# Altium PCB PCB_Main_Board.PcbDoc
Units mm, origin at the board's own origin, x right, y up, seen from the top; angles counter-clockwise.
Board outline 70.8 x 18.88 mm, 4 copper layers (Top Signal, GND, PWR, Bottom Signal), stack 1.075 mm thick; 57 components, 23 nets, 136 pads, 35 vias.
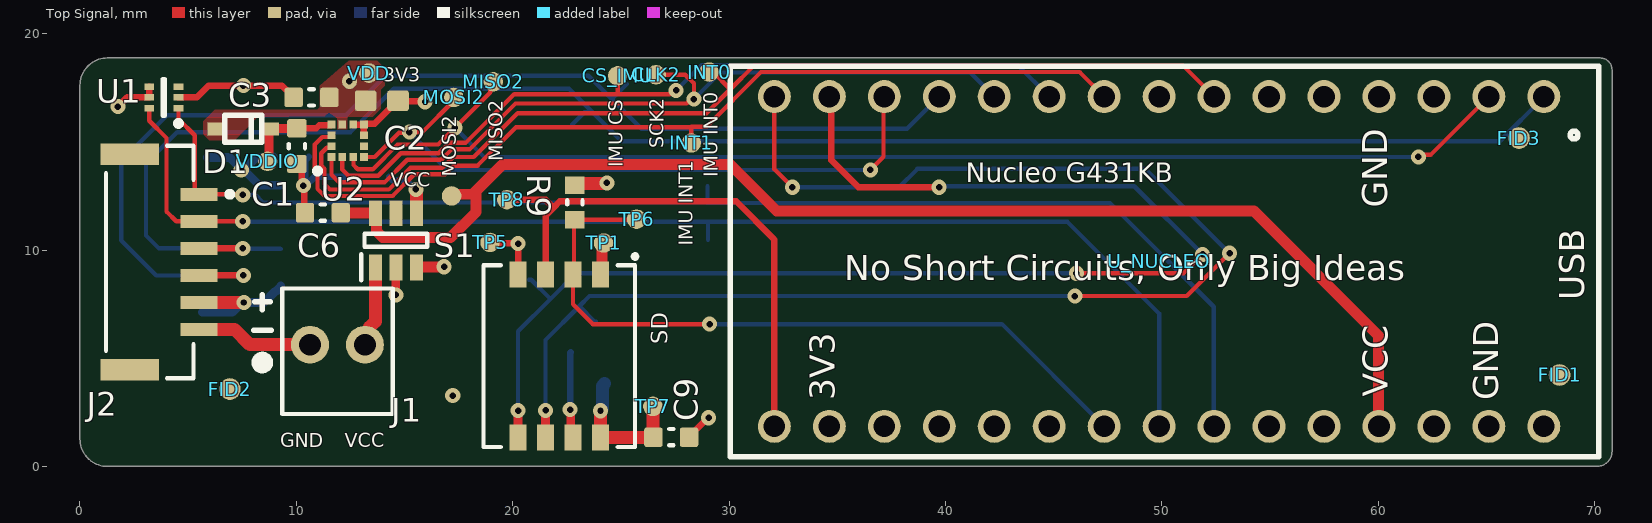
[diagram p0: Top Signal view]
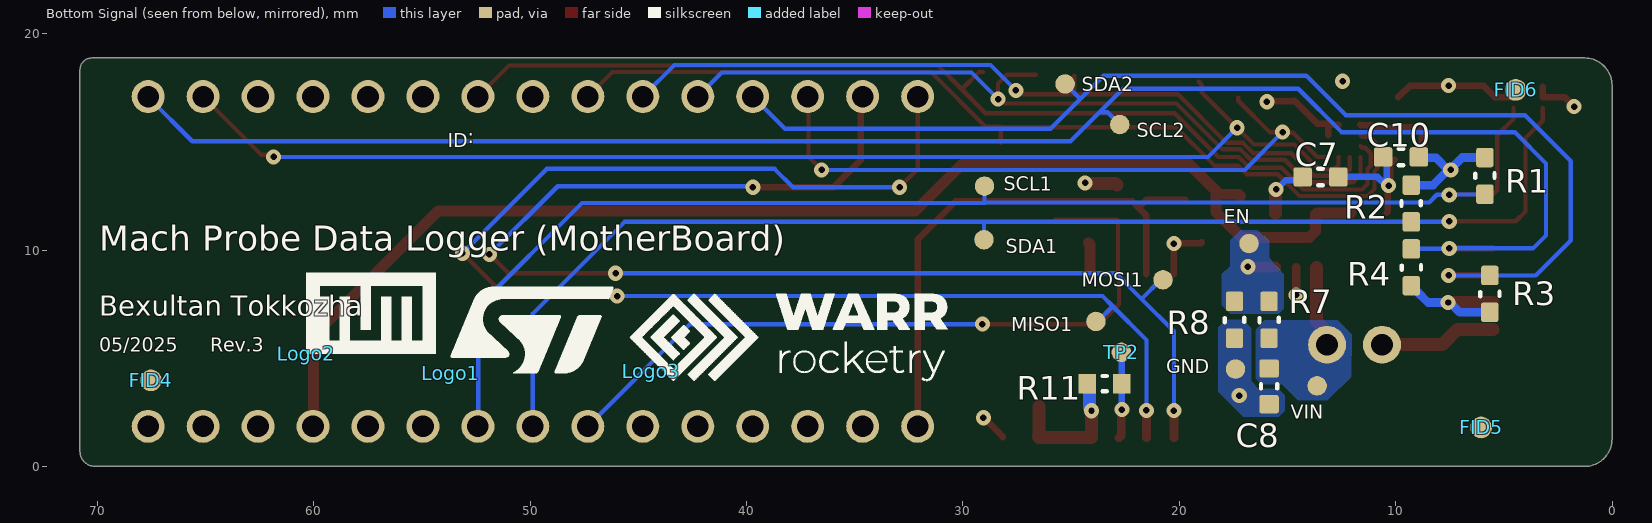
[diagram p1: Bottom Signal view, seen from below]
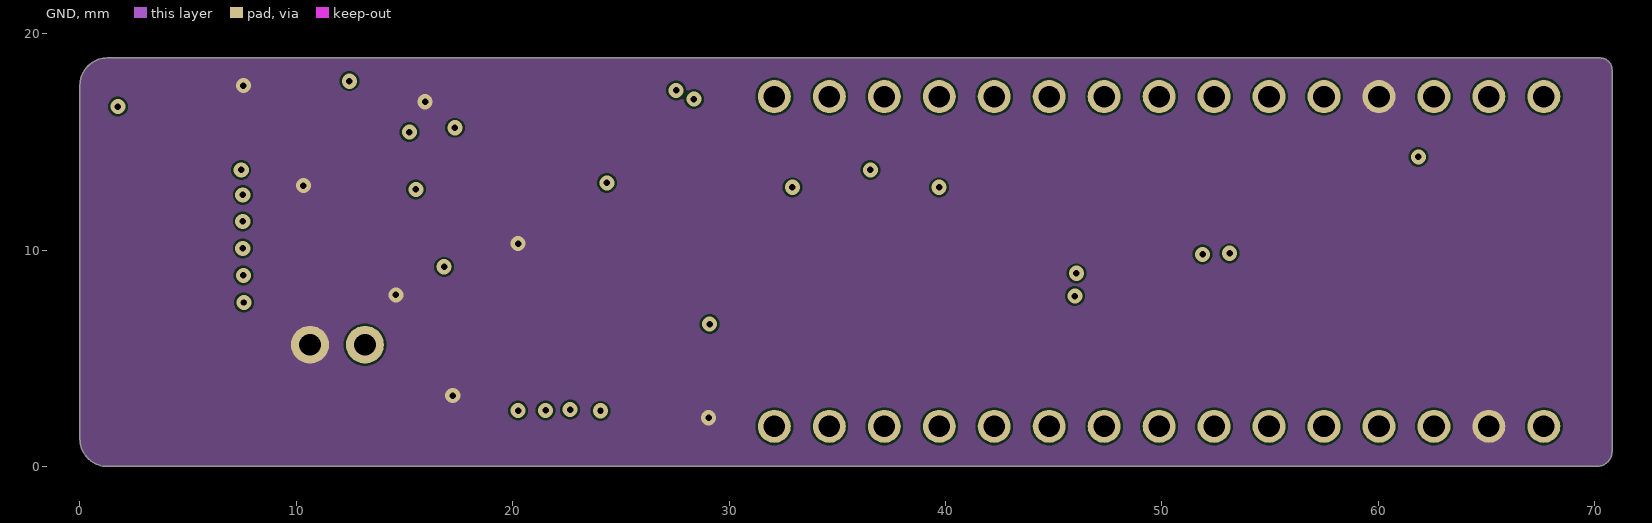
[diagram p2: GND]
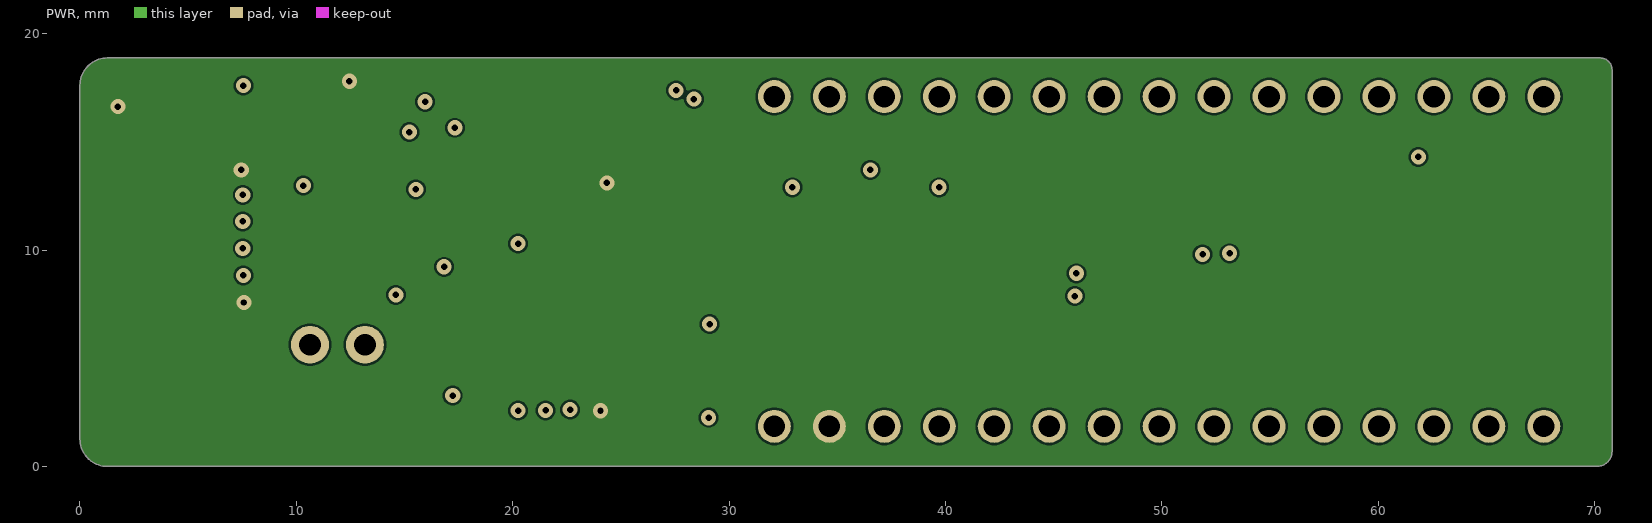
[diagram p3: PWR]
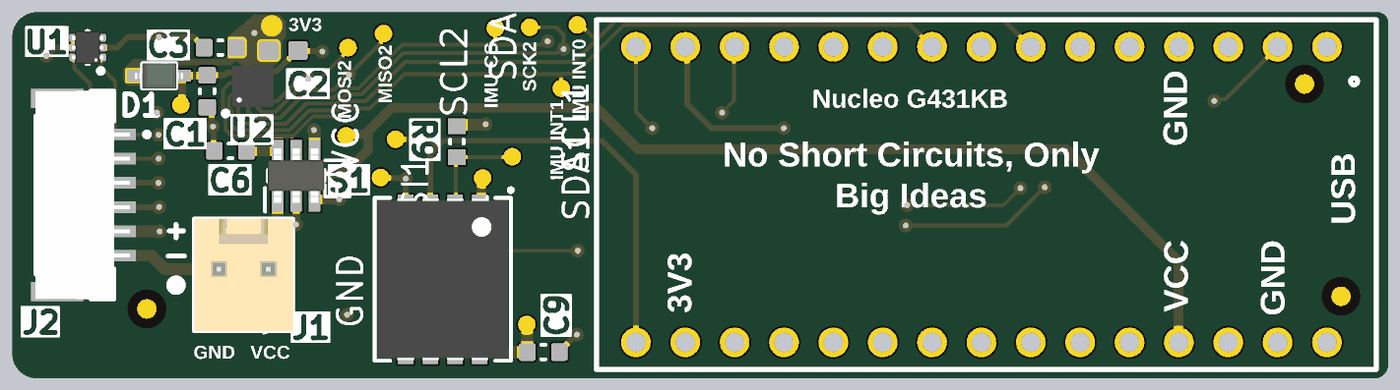
[diagram p4: 3D render of the assembled board from above, using the file's embedded part models]

## Layer stack, top to bottom
Top Solder: solder mask 0.0254, SM-001, Dk 4
Top Signal: signal copper 0.035
Dielectric 2: prepreg 0.1295, PP-017, Dk 4.3
GND: signal copper 0.0175
Dielectric 3: core 0.7112, Core-039, Dk 4.8
PWR: signal copper 0.0175
Dielectric 4: prepreg 0.1295, PP-017, Dk 4.3
Bottom Signal: signal copper 0.035
Bottom Solder: solder mask 0.0254, SM-001, Dk 4

## Board outline
0,1.27 0,17.605 cw(c1.27,17.605) 1.27,18.875 70.25,18.875 cw(c70.25,18.325) 70.8,18.325 70.8,0.7 cw(c70.1,0.7) 70.1,0 1.27,0 cw(c1.27,1.27)

## Design rules (kind name [scope] priority, off if disabled: settings)
Clearance [All] p1: gap=0.1 ignorepadtopadclearanceinfootprint=FALSE
ComponentClearance ComponentClearance_fiducial [HasFootprint('Fiducial_1mm')] p1: gap=0.254 collisioncheckmode=3 verticalgap=0.254 showdistances=FALSE donotcheckwithout3dbody=TRUE
ComponentClearance [All] p2: gap=0.254 collisioncheckmode=3 verticalgap=0.254 showdistances=FALSE
HoleToHoleClearance [All] p1: gap=0.1 allowstackedmicrovias=TRUE
MinimumSolderMaskSliver [All] p1: minsoldermaskwidth=0.1
PolygonConnect [All] p1: connectstyle=Direct reliefconductorwidth=0.254 reliefentries=4 polygonreliefangle="90 Angle" airgapwidth=0.254
RoutingVias [All] p1: holewidth=0.711 width=1.27 viastyle="Through Hole" minholewidth=0.15 minwidth=0.25 maxholewidth=0.711 maxwidth=1.27
SilkToSilkClearance [All] p1: silktosilkclearance=0.1
SilkToSolderMaskClearance [IsPad] p1: minsilkscreentomaskgap=0.1 clearancetoexposedcopper=TRUE
SolderMaskExpansion [All] p1: expansion=0.102 istentingtop=FALSE
SupplyNets "Schematic Supply Nets_3" [InNet('+3V3')] p1: voltage=0.000
SupplyNets "Schematic Supply Nets_2" [InNet('GND')] p2: voltage=0.000
SupplyNets "Schematic Supply Nets_1" [InNet('VCC')] p3: voltage=0.000
SupplyNets "Schematic Supply Nets" [InNet('VCC_Battery')] p4: voltage=0.000
UnRoutedNet [All] p1: checkbadconnections=TRUE
Width [All] p1: maxlimit=1 minlimit=0.1 preferedwidth=0.3
24 further rules are at their usual default settings.

## Classes and differential pairs
component class TEMP_IMU_NAND: 1 C1 C2 C3 C9 C10 CLK2 CS_IMU D1 FID1 FID2 FID3 FID4 FID5 FID6 INT0 INT1 Logo1 Logo2 Logo3 MISO1 MISO2 MOSI1 MOSI2 R9 R11 SD TP1 TP2 TP5 TP6 TP7 TP8 U1 U2 VDD VDDIO

## Components (designator, comment, footprint, x,y, rotation, side; value= is the part's Value field where it differs from the comment)
C1 "C_0603_100n_5%_50V" CAP_0603 10.025,14.8 r90 top value=100nF
C2 "C_0603_10uF" GCM188R71E224KA55J 13.95,16.9 r0 top value=10µF
C3 "C_0603_100n_5%_50V" CAP_0603 10.7,17.05 r180 top value=100nF
C6 "C_0603_100n_5%_50V" CAP_0603 11.225,11.725 r180 top value=100nF
C7 "C_0603_10n_5%_50V" CAP_0603 13.475,13.375 r180 bottom value=10nF
C8 "C_0603_1u_10%_50V" CAP_0603 15.85,3.7 r90 bottom value=1µF
C9 "C_0603_1u_10%_50V" CAP_0603 27.325,1.35 r0 top value=1µF
C10 "C_0603_10n_5%_50V" CAP_0603 9.75,14.3 r0 bottom value=10nF
CLK2 "Testpoint" Testpoint-Footprint-1 26.625,18.1 r270 top
CS_IMU "Testpoint" Testpoint-Footprint-1 24.85,18.05 r270 top
D1 "BAT60A" BAT60A 7.55,15.6 r0 top
EN "Testpoint" Testpoint-Footprint-1 16.775,10.3 r270 bottom
FID1 "Fiducial" Fiducial_1mm 68.375,4.225 r270 top
FID2 "Fiducial" Fiducial_1mm 6.925,3.575 r270 top
FID3 "Fiducial" Fiducial_1mm 66.5,15.175 r270 top
FID4 "Fiducial" Fiducial_1mm 67.525,3.975 r90 bottom
FID5 "Fiducial" Fiducial_1mm 6.05,1.8 r90 bottom
FID6 "Fiducial" Fiducial_1mm 4.45,17.4 r90 bottom
GND "Testpoint" Testpoint-Footprint-1 17.4,4.5 r270 bottom
INT0 "Testpoint" Testpoint-Footprint-1 29.075,18.225 r270 top
INT1 "Testpoint" Testpoint-Footprint-1 28.25,14.95 r270 top
J1 "61900211121" 61900211121 11.9,5.625 r0 top
J2 "SM06B-GHS-TB(LF)(SN)" FP-SM06B-GHS-TB_LF_SN-MFG 3.225,9.45 r270 top locked
Logo1 "ST Microelectronics Logo" "New footprint 1"#1 53.675,4.3 r180 bottom
Logo2 "TUM Logo" "New footprint 1"#1 60.35,5.2 r180 bottom
Logo3 "WARR Rocketry Logo" "WARR Rocketry Logo-Footprint-1" 44.4,4.4 r180 bottom
MISO1 "Testpoint" Testpoint-Footprint-1 23.85,6.7 r270 bottom
MISO2 "Testpoint" Testpoint-Footprint-1 19.1,17.775 r270 top
MOSI1 "Testpoint" Testpoint-Footprint-1 20.75,8.625 r270 bottom
MOSI2 "Testpoint" Testpoint-Footprint-1 17.275,17.05 r270 top
R1 "RES_0603_4k7_1%_0.1W" RES_0603_YAGEO 5.875,13.425 r90 bottom value=4.7k
R2 "RES_0603_4k7_1%_0.1W" RES_0603_YAGEO 9.275,12.15 r90 bottom value=4.7k
R3 "RES_0603_4k7_1%_0.1W" RES_0603_YAGEO 5.65,7.975 r270 bottom value=4.7k
R4 "RES_0603_4k7_1%_0.1W" RES_0603_YAGEO 9.275,9.2 r270 bottom value=4.7k
R7 "RES_0603_182k_1%_0.1W" RES_0603_YAGEO 15.85,6.775 r270 bottom value=182k
R8 "RES_0603_100k_1%_0.1W" RES_0603_YAGEO 17.45,6.775 r270 bottom value=100k
R9 "RES_0603_15k" R_0603_Yageo 22.875,12.2 r90 top value=15k
R11 "RES_0603_15k" R_0603_Yageo 23.45,3.825 r0 bottom value=15k
S1 "TPS22810DBVR" SOT95P280X145-6N 14.6,10.45 r90 top
SCL1 "Testpoint" Testpoint-Footprint-1 29,12.95 r270 bottom
SCL2 "Testpoint" Testpoint-Footprint-1 22.75,15.8 r270 bottom
SD "MKDV08GCL-STP" "New footprint 1"#2 22.15,5.1 r270 top
SDA1 "Testpoint" Testpoint-Footprint-1 29.025,10.475 r270 bottom
SDA2 "Testpoint" Testpoint-Footprint-1 25.275,17.675 r270 bottom
TP1 "Testpoint" Testpoint-Footprint-1 24.2,10.325 r270 top
TP2 "Testpoint" Testpoint-Footprint-1 22.675,5.275 r270 bottom
TP5 "Testpoint" Testpoint-Footprint-1 18.95,10.35 r270 top
TP6 "Testpoint" Testpoint-Footprint-1 25.725,11.425 r270 top
TP7 "Testpoint" Testpoint-Footprint-1 26.475,2.775 r270 top
TP8 "Testpoint" Testpoint-Footprint-1 19.725,12.325 r270 top
U1 "TMP102AIDRLR" SOTFL127P600-8N 3.875,17.05 r180 top
U2 "2533020201601" QFN50P200X200X70-12N 12.375,15.05 r90 top
U_NUCLEO "NUCLEO-G431KB" NUCLEO-G431KB-Footprint-1 67.65,17.09 r180 top locked
VCC "Testpoint" Testpoint-Footprint-1 17.175,12.5 r270 top
VDD "Testpoint" Testpoint-Footprint-1 13.35,18.175 r270 top
VDDIO "Testpoint" Testpoint-Footprint-1 8.675,14.1 r270 top
VIN "Testpoint" Testpoint-Footprint-1 13.625,3.725 r270 bottom

## Footprints (in the part's own frame and the unit in brackets; to place one, negate y for a bottom-side part, rotate by r counter-clockwise, add the part's x,y. Pads: shape width x height; smd on the part's side, far side on the other; paste and mask are expansions set on the pad)
61900211121 [mm]
  round 1.75 hole 1: 1(-1.27,0) 2(1.27,0)
  silkscreen extent -3.72,-3.2 2.55,2.6, body extent -2.54,-3.2 2.54,2.6, height 11.5
BAT60A [mm]
  rect 0.8x0.6 smd: 1(-1.25,0) 2(1.25,0)
  silkscreen extent -0.85,-0.63 0.85,0.63, body extent -1.25,-0.65 1.25,0.65, height 1.1
CAP_0603 [mm] "Chip Capacitor, 2-Leads, Body 1,60x0,80mm, IPC Medium Density"
  rrect25% 0.85x0.9 smd: 1(-0.825,0) 2(0.825,0)
  silkscreen extent -0.1,-0.38 0.1,0.38, body extent -0.85,-0.45 0.85,0.45, height 0.55
Fiducial_1mm [mm] "1mm fiducial"
  round 1 smd paste-0.5 mask+0.5: 1(0,0)
  body extent -0.5,-0.5 0.5,0.5
FP-SM06B-GHS-TB_LF_SN-MFG [mm]
  rect 0.6x1.7 smd paste+0 mask+0: 1(-3.125,2.275) 2(-1.875,2.275) 3(-0.625,2.275) 4(0.625,2.275) 5(1.875,2.275) 6(3.125,2.275)
  rect 1x2.7 smd paste+0 mask+0: 7(-4.975,-0.925) 8(4.975,-0.925)
  silkscreen extent -5.38,-2.02 5.38,3.83, body extent -5.58,-2.37 5.58,3.22, height 0.25
GCM188R71E224KA55J [mm] "0603 Murata Electronics Capacitors"
  rrect25% 1x0.95 smd: 1(-0.75,0) 2(0.75,0)
  body extent -0.85,-0.45 0.85,0.45, height 0.9
"New footprint 1"#1 [mm]
  silkscreen extent 0,0 7.52,4
"New footprint 1"#2 [mm]
  rect 1.2x0.8 smd: 1(-3.77,1.905) 2(-3.77,0.635) 3(-3.77,-0.635) 4(-3.77,-1.905) 5(3.77,-1.905) 6(3.77,-0.635) 7(3.77,0.635) 8(3.77,1.905)
  silkscreen extent -4.7,-3.5 4.2,3.6, body extent -4.15,-3.35 4.15,3.35, height 0.95
NUCLEO-G431KB-Footprint-1 [mil]
  round 60 hole 39.37: 1(0,0) 2(100,0) 3(200,0) 4(300,0) 5(400,0) 6(500,0) 7(600,0) 8(700,0) 9(800,0) 10(900,0) 11(1000,0) 12(1100,0) 13(1200,0) 14(1300,0) 15(1400,0) 16(1400,600) 17(1300,600) 18(1200,600) 19(1100,600) 20(1000,600) 21(900,600) 22(800,600) 23(700,600) 24(600,600) 25(500,600) 26(400,600) 27(300,600) 28(200,600) 29(100,600) 30(0,600)
  silkscreen extent -100,-55 1480,655
QFN50P200X200X70-12N [mm] "QFN, 12-Leads, Body 2,00x2,00mm, Pitch 0,50mm, IPC Medium Density"
  rect 0.375x0.35 smd: 1(-0.75,0.75) 2(-0.75,0.25) 3(-0.75,-0.25) 4(-0.75,-0.75) 7(0.75,-0.75) 8(0.75,-0.25) 9(0.75,0.25) 10(0.75,0.75)
  rect 0.35x0.375 smd: 5(-0.25,-0.75) 6(0.25,-0.75) 11(0.25,0.75) 12(-0.25,0.75)
  silkscreen extent -1.52,1.27 -1.27,1.52, body extent -1.05,-1.05 1.05,1.05, height 0.7
R_0603_Yageo [mm] "Chip Resistor, 2-Leads, Body 1,65x0,85mm, IPC Medium Density"
  rect 0.8x0.9 smd: 1(-0.8,0) 2(0.8,0)
  silkscreen extent -0.1,-0.35 0.1,0.35, body extent -0.85,-0.45 0.85,0.45, height 0.55
RES_0603_YAGEO [mm] "Chip Resistor, 2-Leads, Body 1,60x0,80mm, IPC Medium Density"
  rrect25% 0.9x0.8 smd: 1(-0.85,0) 2(0.85,0)
  silkscreen extent -0.1,-0.44 0.12,0.45, body extent -0.85,-0.45 0.85,0.45, height 0.55
SOT95P280X145-6N [mm]
  rect 1.2x0.6 smd: 1(-1.25,0.95) 2(-1.25,0) 3(-1.25,-0.95) 4(1.25,-0.95) 5(1.25,0) 6(1.25,0.95)
  silkscreen extent -1.85,-1.45 0.3,1.6, body extent -1.4,-1.45 1.4,1.45, height 1.2
SOTFL127P600-8N [mm]
  rect 0.45x0.3 smd paste+0.05: 1(-0.675,0.5) 2(-0.675,0) 3(-0.675,-0.5) 4(0.675,-0.5) 5(0.675,0) 6(0.675,0.5)
  silkscreen extent -0.8,-0.85 0.05,1.32, body extent -0.8,-0.85 0.8,0.85, height 0.6
Testpoint-Footprint-1 [mm]
  round 0.9 smd paste-0.45 mask+0.1: 1(0,0)
"WARR Rocketry Logo-Footprint-1" [mm]
  silkscreen extent -0.98,-0.46 13.7,3.58

## Part data
C1 C3 C6: library part CMP-001-00115-4, "Ceramic Capacitor, Multilayer, Ceramic, 50V, 5% +Tol, 5% -Tol, X7R, 15% TC, 0.1uF, Surface Mount, 0603", Capacitor Type=Ceramic, Case/Package=0603, Max Operating Temperature=125°C, Min Operating Temperature=-55°C, Voltage Rating=50V, Mounting Technology="Surface Mount", Pins=2, RoHS Compliant=Yes
C2: library part CMP-001-00105-2, "Ceramic Capacitor, Multilayer, Ceramic, 16V, 20% +Tol, 20% -Tol, X6S, 22% TC, 10uF, Surface Mount, 0603", Capacitor Type=Ceramic, Case/Package=0603, Max Operating Temperature=105°C, Min Operating Temperature=-55°C, Package Shape=Rectangular, Package Style=SMTMeter, Rated DC Voltage (URdc)=16V, Temperature Characteristics Code=X6S, Tolerance  (fill in as +-)=20%, Dielectric Material=Ceramic, Height=0.8mm, JESD-609 Code=e3, Length=1.6mm, Mounting Technology="Surface Mount", Multilayer=Yes, Packaging="Tape and Reel", Pins=2, Reach SVHC Compliant=Yes, RoHS Compliant=Yes, Terminal Finish=Nickel, Termination=Wraparound, Tolerance (fill in as +-)=20%, Width=0.8mm
C7 C10: library part CMP-001-00107-9, "Ceramic Capacitor, Multilayer, Ceramic, 50V, 5% +Tol, 5% -Tol, X7R, 15% TC, 0.01uF, Surface Mount, 0603", Capacitor Type=Ceramic, Case/Package=0603, Max Operating Temperature=125°C, Min Operating Temperature=-55°C, Tolerance=5%, Voltage Rating=50V, Mounting Technology="Surface Mount", Pins=2, RoHS Compliant=Yes
C8 C9: library part CMP-001-00112-5, "Ceramic Capacitor, Multilayer, Ceramic, 50V, 10% +Tol, 10% -Tol, 1uF, Surface Mount, 0603", Capacitor Type=Ceramic, Case/Package=0603, Max Operating Temperature=85°C, Min Operating Temperature=-55°C, Voltage Rating=50V, Mounting Technology="Surface Mount", Pins=2, RoHS Compliant=Yes
CLK2 CS_IMU EN GND INT0 INT1 MISO1 MISO2 MOSI1 MOSI2 SCL1 SCL2 SDA1 SDA2 TP1 TP2 TP5 TP6 TP7 TP8 VCC VDD VDDIO VIN: library part CMP-00030-00002-7, "Schematic for Testpoint"
D1: library part CMP-004-00038-1, "Rectifier Diode, Shottky, 3A, 10V", Forward Current=3A, Max Operating Temperature=150°C, Max Surge Current=5A, Min Operating Temperature=-55°C, Peak Inverse Voltage=10V, Mounting Technology=SMT, RoHS Compliant=Yes
FID1 FID2 FID3 FID4 FID5 FID6: library part CMP-00055-6, "1mm Fiducial"
J1: library part CMP-00047-5, "Molex KK 2 Pin", Contact Resistance=20mR, Dielectric Withstanding Voltage (AC)=1kV, Insulation Color=Beige, Insulation Resistance=1GR, Manufacturer Series=6190, Max Operating Temperature=105°C, Min Operating Temperature=-40°C, Rated Current (Signal)=3A, Additional Feature="ROHS COMPLIANT", Body Breadth=0.228inch, Body Depth=0.453inch, Body Length=0.201inch, Body/Shell Style=RECEPTACLE, Connector Type="BOARD CONNECTOR", Contact Finish - Mating=SN, Contact Finish - Termination="Tin (Sn) - with Nickel (Ni) barrier", Contact Gender=Male, Contact Material="Copper Alloy", Contact Pattern=RECTANGULAR, Contact Style="SQ PIN-SKT", Durability=25Cycles, Insulation Material=Nylon, JESD-609 Code=e3, Mating Contact Pitch=0.1inch, Mounting Option 1=LOCKING, Mounting Style=STRAIGHT, Mounting Technology=Board, Number Of Connectors=1, Number of Contacts=2, Number Of PCB Rows=1, Number of Rows Loaded=1, PCB Contact Pattern=RECTANGULAR, Polarization Key="POLARIZED HOUSING", Reach SVHC Compliant=Yes, Reference Standard=UL, Reliability=COMMERCIAL, RoHS Compliant=Yes, Terminal Length=0.134inch, Terminal Pitch=2.54mm, Termination=Solder
J2: library part CMP-17439-000061-1, "CONN HEADER SMD R/A 6POS 1.25MM", Color=Natural, Contact Resistance=50mR, Current Rating=1A, Housing Color=Beige, Max Operating Temperature=85°C, Max Voltage Rating (AC)=50V, Min Operating Temperature=-25°C, Connector Type="Outer Shroud Contact", Contact Material=Bronze, Contact Plating=Tin, Depth=4.05mm, Fastening Type=Ramp, Housing Material=Polyamide, Lead Free="Lead Free", Length=10.75mm, Max Current Rating=1A, Mount="Surface Mount", Number of Contacts=6, Number of Positions=6, Number of Rows=1, Orientation="Right Angle", Packaging="Tape and Reel", Pitch=1.25mm, Termination=Solder, Voltage Rating=50V
Logo1: library part CMP-00030-00023-1, "ST Microelectronics Logo 6x4mm"
Logo2: library part CMP-00030-00022-1, "6 x 4 mm TUM Logo"
Logo3: library part CMP-00030-00024-1, "Warr Rocketry Logo"
R1 R2 R3 R4: library part CMP-009-00218-2, "Fixed Resistor, Metal Glaze/thick Film, 0.1W, 4700ohm, 75V, 1% +/-Tol, 100ppm/Cel, Surface Mount, 0603", Case/Package=0603, Max Operating Temperature=155°C, Min Operating Temperature=-55°C, Power=100mW, Tolerance=1%, Mounting Technology="Surface Mount", RoHS Compliant=Yes
R7: library part CMP-009-00229-2, "Fixed Resistor, Metal Glaze/thick Film, 0.1W, 182000ohm, 75V, 1% +/-Tol, 100ppm/Cel, Surface Mount, 0603", Case/Package=0603, Max Operating Temperature=155°C, Min Operating Temperature=-55°C, Power=100mW, Tolerance=1%, Mounting Technology="Surface Mount", RoHS Compliant=Yes
R8: library part CMP-009-00200-5, "Fixed Resistor, Metal Glaze/thick Film, 0.1W, 100000ohm, 75V, 1% +/-Tol, 100ppm/Cel, Surface Mount, 0603", Case/Package=0603, Max Operating Temperature=155°C, Min Operating Temperature=-55°C, Power=100mW, Tolerance=1%, Mounting Technology="Surface Mount", RoHS Compliant=Yes
R9 R11: library part CMP-009-00285-1, "Fixed Resistor, Metal Glaze/thick Film, 0.1W, 15000ohm, 75V, 1% +/-Tol, 100ppm/Cel, Surface Mount, 0603", Case/Package=0603, LCSC Part Number (0 if N/A)=0, Power=100mW, Tolerance=1%, Voltage Rating=75V, Mounting Technology=SMD, Mouser Part Number (0 if N/A)=0
S1: "Switch", Manufacturer_Name="Texas Instruments", Mouser Part Number=595-TPS22810DBVR, Arrow Part Number=TPS22810DBVR, Arrow Price/Stock=https://www.arrow.com/en/products/tps22810dbvr/texas-instruments?utm_currency=USD&region=nac, Datasheet Link=http://www.ti.com/lit/gpn/tps22810, Height=1.45mm, Manufacturer_Part_Number=TPS22810DBVR, Mouser Price/Stock=https://www.mouser.co.uk/ProductDetail/Texas-Instruments/TPS22810DBVR?qs=34RfhUjJmKcFqeJVMZZhPA%3D%3D
SD: library part CMP-016-000053-1, LCSC Part Number (0 if N/A)=C19192126, Mouser Part Number (0 if N/A)=0
U1: library part CMP-00053-2, "Digital Temperature Sensor, I2C,12 Bit(s), ±2C, SOT563", LCSC Part number=C99269, Max Operating Temperature=125°C, Min Operating Temperature=-40°C, Mouser Part Number=595-TMP102AIDRLR
U2: library part CMP-00083-2, "WSEN-ITDS Accelerometer X, Y, Z Axis ±2g, 4g, 8g, 16g 0.08Hz ~ 400Hz 12-LGA (2x2)", LCSC Part Number (0 if N/A)=0, Mouser Part Number (0 if N/A)=710-2533020201601
U_NUCLEO: library part CMP-00030-00006-8, "STM32G431 Nucleo-32 Bit ARM Cortex-M4 Microcontroller Evaluation Board"

## Via types
v1: diameter 0.7, hole 0.3, Top Signal to Bottom Signal, tented both sides, 35 vias

## Nets (pads, with @x,y where several pads share a name; then routed paths per layer and width w, separated by ;. In a path a pad name is that pad's centre, name@x,y a point inside that pad or via, vN(x,y) a via of type N, cw(c..) or ccw(c..) an arc to the next point about the centre after c; other vN are vias at no path point)
+3V3: C2.1 C3.1 C9.1 C10.1 D1.1 J2.5 R1.2 R2.2 R3.2 R4.2 R9.2 R11.2 SD.8 TP7.1 U1.4 U1.5 U2.9 U_NUCLEO.17 VDD.1 | length 21.9
  Top Signal w0.3: v1(1.75,16.625) 2.175,17.05 U1.5 U1.4
  Top Signal w0.6: J2.5 v1(7.575,7.575) ; R9.2 22.956,13.081 24.331,13.081 v1(24.35,13.1) ; v1(24.055,2.57) SD.8 24.065,1.34 26.49,1.34 C9.1 26.488,1.362 26.488,2.762 TP7.1
  Bottom Signal w0.4: R3.2 7.044,7.125 7.494,7.575 v1(7.575,7.575) 8.5,7.575 9.025,8.1 9.075,8.1 9.275,8.3 R4.2 ; R1.2 6.919,14.275 7.494,13.7 v1@7.575,13.7 ; C10.1 8.884,14.259 8.134,14.259 v1@7.575,13.7 ; R2.2 8.275,13 v1@7.575,13.7
  Bottom Signal w0.6: v1(24.055,2.57) 24.055,2.597 24.15,2.692 24.15,3.725 R11.2
  other v1: 7.45,13.7 12.45,17.8
CS_IMU: CS_IMU.1 U2.2 U_NUCLEO.10 | length 36.9
  Top Signal w0.2: U2.2 12.125,13.725 12.415,13.435 13.785,13.435 14.825,14.475 16.574,14.475 17.049,14.95 17.813,14.95 20.063,17.2 24.825,17.2 ; CS_IMU.1 24.85,17.225 24.825,17.2 ; v1(27.55,17.375) 27.415,17.375 27.24,17.2 24.825,17.2
  Bottom Signal w0.2: v1(27.55,17.375) 28.725,18.55 43.33,18.55 U_NUCLEO.10
CS_NAND: R9.1 SD.2 TP6.1 U_NUCLEO.22 | length 33.7
  Top Signal w0.2: TP6.1@25.736,11.4 R9.1 22.83,11.355 22.83,8.915 SD.2 22.785,7.49 23.7,6.575 v1(29.1,6.575)
  Bottom Signal w0.2: v1(29.1,6.575) 42.605,6.575 U_NUCLEO.22
GND: C1.1 C2.2 C3.2 C6.2 C7.2 C8.1 C9.2 C10.2 GND.1 J1.1 J2.6 R8.2 S1.2 SD.4 TP5.1 U1.2 U2.6 U2.7 U2.8 U_NUCLEO.4 U_NUCLEO.29 | length 27.5
  Top Signal w0.3: U1.2 5.4,17.05 5.95,17.6 v1(7.55,17.6) 9.325,17.6 9.575,17.35 9.6,17.35 9.875,17.075 C3.2 ; C1.1@10.05,14.175 C1.1@10.248,13.977 ; C1.1@10.248,14.152 C1.1@10.248,13.977 ; C6.2 10.362,11.763 10.362,12.938 v1(10.325,12.975) 10.248,13.052 C1.1@10.248,13.977 ; U2.8 U2.7 ; U2.6 U2.7 ; v1(15.95,16.85) 15.925,16.875 14.725,16.875 C2.2 14.675,16.9 13.612,15.837 13.15,15.837 13.125,15.812 U2.7 ; TP5.1 18.978,10.322 20.218,10.322 v1(20.245,10.295) SD.4 ; C9.2 28.15,1.375 29.025,2.25 v1(29.05,2.25)
  Top Signal w0.4: v1(14.6,7.925) S1.2
  Top Signal w0.6: J2.6 7.151,6.325 7.851,5.625 J1.1
  Bottom Signal w0.3: C10.2 10.402,14.127 10.402,13.052 v1(10.325,12.975) 10.433,12.975 10.833,13.375 C7.2
  other v1: 17.225,3.275
I2C1_SCL: J2.1 R1.1 SCL1.1 U1.1 U_NUCLEO.24 | length 61.4
  Top Signal w0.2: U1.1 4.55,16.05 5.3,15.3 5.3,12.775 J2.1 7.5,12.575 v1(7.525,12.55)
  Bottom Signal w0.2: R1.1 5.887,12.562 7.512,12.562 v1(7.525,12.55) 8.1,12.55 8.45,12.2 29,12.2 ; SCL1.1 29,12.2 ; U_NUCLEO.24@52.395,1.85 52.395,7.38 47.6,12.175 28.975,12.175 29,12.2
I2C1_SDA: J2.2 R2.1 SDA1.1 U1.6 U_NUCLEO.23 | length 59
  Top Signal w0.2: U1.6 3.2,15.975 4,15.175 4,11.775 4.45,11.325 v1(7.525,11.325)
  Bottom Signal w0.2: v1(7.525,11.325) 7.538,11.312 9.263,11.312 R2.1 29.075,11.3 ; SDA1.1 29.025,11.25 29.075,11.3 ; U_NUCLEO.23 49.87,7.065 45.635,11.3 29.075,11.3
I2C2_SCL: J2.3 R4.1 SCL2.1 U_NUCLEO.1 | length 80.9
  Top Signal w0.3: J2.3 v1(7.525,10.075)
  Bottom Signal w0.2: R4.1 9.263,10.062 7.538,10.062 v1(7.525,10.075) 3.65,10.075 3.05,10.675 3.05,14 4.5,15.45 12.499,15.45 14.499,17.45 22.6,17.45 23.682,16.368 ; SCL2.1 23.318,16.368 23.682,16.368 ; U_NUCLEO.1@67.635,17.05 65.61,15.025 25.025,15.025 23.682,16.368
I2C2_SDA: J2.4 R3.1 SDA2.1 U_NUCLEO.12 | length 54.1
  Top Signal w0.3: J2.4 v1(7.55,8.825)
  Bottom Signal w0.2: v1(7.55,8.825) R3.1 3.525,8.825 1.9,10.45 1.9,14.1 4.025,16.225 12.3,16.225 14.125,18.05 23.5,18.05 24.6,16.95 ; SDA2.1 24.6,17 24.6,16.95 ; U_NUCLEO.12 38.22,15.6 25.95,15.6 24.6,16.95
IMU_INT0: INT0.1 U2.12 U_NUCLEO.7 | length 47.6
  Top Signal w0.2: U2.12 11.55,14.725 11.405,14.725 11.15,14.47 11.15,13.9 11.3,13.75 11.3,13.05 11.55,12.8 14.275,12.8 15.275,13.8 16.748,13.8 17.248,14.3 18.2,14.3 20.225,16.325 28.95,16.325 30.05,17.425 ; INT0.1 29.25,18.225 30.05,17.425 ; U_NUCLEO.7 50.975,18.525 31.15,18.525 30.05,17.425
IMU_INT1: INT1.1 U2.11 U_NUCLEO.9 | length 43.1
  Top Signal w0.2: U2.11 11.55,15.225 11.2,15.225 10.85,14.875 10.85,13.773 10.975,13.648 10.975,12.825 11.3,12.5 14.447,12.5 15.447,13.5 16.872,13.5 17.272,13.9 18.375,13.9 20.15,15.675 28.25,15.675 ; INT1.1 28.25,15.675 ; 28.25,15.7 28.95,15.7 31.475,18.225 46.195,18.225 U_NUCLEO.9 ; 28.275,15.7 28.25,15.675
NetC1_2: C1.2 D1.2 U2.10 VDDIO.1 | length 4.4
  Top Signal w0.3: C1.2 10.925,15.625 11.062,15.762 11.6,15.762 11.625,15.787 U2.10
  Top Signal w0.4: VDDIO.1 8.738,14.163 8.738,15.538 8.812,15.612 9.987,15.612 C1.2@9.992,15.608
NetC7_1: C7.1 S1.4 | length 2.6
  Top Signal w0.6: v1(15.525,12.8) 15.525,12.773 15.55,12.748 S1.4
  Bottom Signal w0.3: C7.1 14.3,13.35 14.425,13.225 15.073,13.225 15.498,12.8 v1(15.525,12.8)
NetEN_1: EN.1 R7.1 R8.1 S1.3 | length 1.3
  Top Signal w0.5: S1.3 15.563,9.213 16.813,9.213 v1(16.825,9.225)
NetR11_1: R11.1 SD.7 TP2.1 | length 4
  Top Signal w0.4: v1(22.65,2.625) 22.65,2.598 22.685,2.563 22.685,1.43 SD.7
  Bottom Signal w0.3: v1(22.65,2.625) R11.1 22.662,3.838 22.662,5.263 TP2.1
NetSD_1: SD.1 TP1.1 | length 1.5
  Top Signal w0.5: SD.1 24.128,8.943 24.128,10.253 TP1.1
SPI1_CLK: SD.3 TP8.1 U_NUCLEO.16 | length 25.2
  Top Signal w0.3: TP8.1 21.515,12.325 21.882,11.957 ; SD.3 21.515,11.59 21.882,11.957 ; U_NUCLEO.16 32.09,10.485 30.325,12.25 22.175,12.25 21.882,11.957
SPI1_MISO: MISO1.1 SD.6 U_NUCLEO.15 | length 65.5
  Top Signal w0.2: U_NUCLEO.15 32.09,13.735 v1(32.925,12.9) ; v1(45.975,7.875) 51.15,7.875 v1(53.125,9.85)
  Top Signal w0.4: SD.6 v1(21.515,2.585)
  Bottom Signal w0.2: v1(21.515,2.585) 21.515,5.84 23.075,7.4 ; MISO1.1 23.775,6.7 23.075,7.4 ; v1(32.925,12.9) 37.85,12.9 38.7,13.75 49.225,13.75 v1(53.125,9.85) ; v1(45.975,7.875) 23.55,7.875 23.075,7.4
SPI1_MOSI: MOSI1.1 SD.5 U_NUCLEO.14 | length 61.3
  Top Signal w0.2: v1(46.05,8.925) 51,8.925 v1(51.875,9.8)
  Top Signal w0.3: U_NUCLEO.14 34.728,16.992 34.728,14.147 35.975,12.9 v1(39.7,12.9)
  Top Signal w0.4: SD.5 v1(20.245,2.58)
  Bottom Signal w0.2: v1(20.245,2.58) 20.245,6.245 21.737,7.738 ; MOSI1.1 20.85,8.625 21.737,7.738 ; v1(39.7,12.9) 39.75,12.95 48.725,12.95 v1(51.875,9.8) ; v1(46.05,8.925) 22.925,8.925 21.737,7.738
SPI2_CLK: CLK2.1 U2.1 U_NUCLEO.11 | length 36.8
  Top Signal w0.2: U2.1 11.625,13.475 11.975,13.125 14.075,13.125 15.125,14.175 16.699,14.175 17.174,14.65 18,14.65 20.125,16.775 28.04,16.775 28.24,16.975 v1(28.375,16.975) 28.375,17.7 27.975,18.1 CLK2.1
  Bottom Signal w0.2: v1(28.375,16.975) 29.6,18.2 41.14,18.2 U_NUCLEO.11
SPI2_MISO: MISO2.1 U2.3 U_NUCLEO.2 | length 58.3
  Top Signal w0.2: U2.3 12.643,14.282 12.643,13.932 12.84,13.735 13.535,13.735 14.675,14.875 16.55,14.875 v1(17.325,15.65) 18.966,17.291 18.966,17.641 MISO2.1 ; v1(61.85,14.3) 61.946,14.396 62.416,14.396 U_NUCLEO.2
  Bottom Signal w0.2: v1(17.325,15.65) 18.675,14.3 v1(61.85,14.3)
SPI2_MOSI: MOSI2.1 U2.4 U_NUCLEO.13 | length 31.1
  Top Signal w0.2: U2.4 13.625,14.3 14.74,15.415 15.19,15.415 v1(15.225,15.45) 15.825,15.45 17.275,16.9 MOSI2.1 ; v1(36.525,13.7) 37.135,14.31 37.135,17.055 U_NUCLEO.13
  Bottom Signal w0.2: v1(15.225,15.45) 16.975,13.7 v1(36.525,13.7)
VCC: C6.1 S1.6 U_NUCLEO.27 VCC.1 | length 59.6
  Top Signal w0.5: C6.1 12.063,11.712 13.637,11.712 S1.6 13.7,11.65 13.7,10.868 13.993,10.575 17.125,10.575 18.3,11.75 18.3,12.725 ; VCC.1 17.252,12.577 18.152,12.577 18.3,12.725 ; U_NUCLEO.27@60.015,1.85 60.015,6.035 54.25,11.8 32.2,11.8 30.05,13.95 19.525,13.95 18.3,12.725
VCC_Battery: C8.2 J1.2 R7.2 S1.1 VIN.1 | length 3.8
  Top Signal w0.6: J1.2 13.39,5.845 13.39,6.44 13.65,6.7 S1.1
pads on no net: FID1.1 FID2.1 FID3.1 FID4.1 FID5.1 FID6.1 J2.7 J2.8 S1.5 U1.3 U2.5 U_NUCLEO.3 U_NUCLEO.5 U_NUCLEO.6 U_NUCLEO.8 U_NUCLEO.18 U_NUCLEO.19 U_NUCLEO.20 U_NUCLEO.21 U_NUCLEO.25 U_NUCLEO.26 U_NUCLEO.28 U_NUCLEO.30

## Polygon pours and split planes (outlines as drawn)
NetEN_1 on Bottom Signal "GND" (solid, pour order 32): 15.85,9.625 15.85,10.4 16.375,10.925 17.175,10.925 17.65,10.45 17.65,9.25 18.025,8.875 18.025,7.45 17.625,7.05 15.4,7.05 15.175,7.275 15.175,8.875
VCC_Battery on Bottom Signal "GND" (solid, pour order 31): 15.25,3.8 14.5,3.05 13.15,3.05 12.058,4.142 12.017,6.092 12.675,6.75 16.05,6.75 16.475,6.325 16.475,4.075 16.2,3.8
GND on Bottom Signal "GND" (solid, pour order 34): 15.125,3.3 15.425,3.6 16.35,3.6 16.675,3.925 16.675,6.375 17.075,6.775 17.825,6.775 18.2,6.4 18.2,4.275 18.2,3.45 17.05,2.3 15.4,2.3 15.125,2.575
+3V3 on Top Signal "GND" (solid, pour order 35): 7.15,15.075 7.475,15.4 8.225,16.15 11.297,16.15 11.501,16.355 11.895,16.084 11.895,15.575 12.345,15.575 12.345,16.1 12.395,16.15 13.52,16.15 13.895,16.525 13.895,17.4 14.095,17.6 14.095,18.4 13.745,18.75 12.432,18.75 11.075,17.598 11.075,16.593 10.957,16.475 6.225,16.475 5.7,15.95 5.7,15.35 5.975,15.075
+3V3 on PWR "PWR" (solid, pour order 30): 0,1.27 0,17.605 cw(c1.27,17.605) 1.27,18.875 70.25,18.875 cw(c70.25,18.325) 70.8,18.325 70.8,0.7 cw(c70.1,0.7) 70.1,0 1.27,0 cw(c1.27,1.27)
GND on GND "GND" (solid, pour order 29): 0,1.27 0,17.605 cw(c1.27,17.605) 1.27,18.875 70.25,18.875 cw(c70.25,18.325) 70.8,18.325 70.8,0.7 cw(c70.1,0.7) 70.1,0 1.27,0 cw(c1.27,1.27)

## Silkscreen, mask and mechanical layers (free items; w line width, h text height)
Top Overlay:
  lines w0.254: 8.025,6.3 8.85,6.3 ; 8.075,7.6 8.8,7.6 ; 8.425,7.25 8.425,7.925
  text "3V3" at 14.025,17.55 h1.1
  text "SCK2" at 27.2,14.705 h1.1 r90
  text "MISO2" at 19.775,14.104 h1.1 r90
  text "IMU CS" at 25.325,13.824 h1.1 r90
  text "MOSI2" at 17.627,13.379 h1.1 r90
  text "IMU INT0" at 29.698,13.353 h1.1 r90
  text "GND" at 60.807,11.949 h2 r90
  text "IMU INT1" at 28.548,10.209 h1.1 r90
  text "No Short Circuits, Only Big Ideas" at 35.321,8.212 h2
  text "USB" at 69.92,7.677 h2 r90
  text "VCC" at 60.819,3.216 h2 r90
  text "3V3" at 35.266,3.064 h2 r90
  text "GND" at 65.945,3.062 h2 r90
  text "GND" at 9.265,0.65 h1.1
  text "VCC" at 12.225,0.65 h1.1
Bottom Overlay:
  text "ID:" at 53.8,15.625 h1.1 r180
  text "Mach Probe Data Logger (MotherBoard)" at 69.919,9.585 h2
  text "Bexultan Tokkozha" at 69.906,6.628 h1.6
  text "Rev.3" at 64.786,5.075 h1.1
  text "05/2025" at 69.911,5.075 h1.1
Mechanical 1:
  lines w0.254: 0,1.27 ccw(c1.27,1.27) 1.27,0 70.1,0 ccw(c70.1,0.7) 70.8,0.7 70.8,18.325 ccw(c70.25,18.325) 70.25,18.875 1.27,18.875 ccw(c1.27,17.605) 0,17.605 0,17.075 0,1.27

## Text inside footprints (layer, text, board x,y; h text height)
U_NUCLEO: Top Overlay "Nucleo G431KB" at 40.929,12.836 h1.52